# Altium PCB Zigbee_PCB.PcbDoc
Units mm, origin at the board's own origin, x right, y up, seen from the top; angles counter-clockwise.
Board outline 114.3 x 82.3 mm, 4 copper layers (Top Layer, Internal Plane 1, Internal Plane 2, Bottom Layer), stack 0.462 mm thick; 66 components, 51 nets, 247 pads, 36 vias.
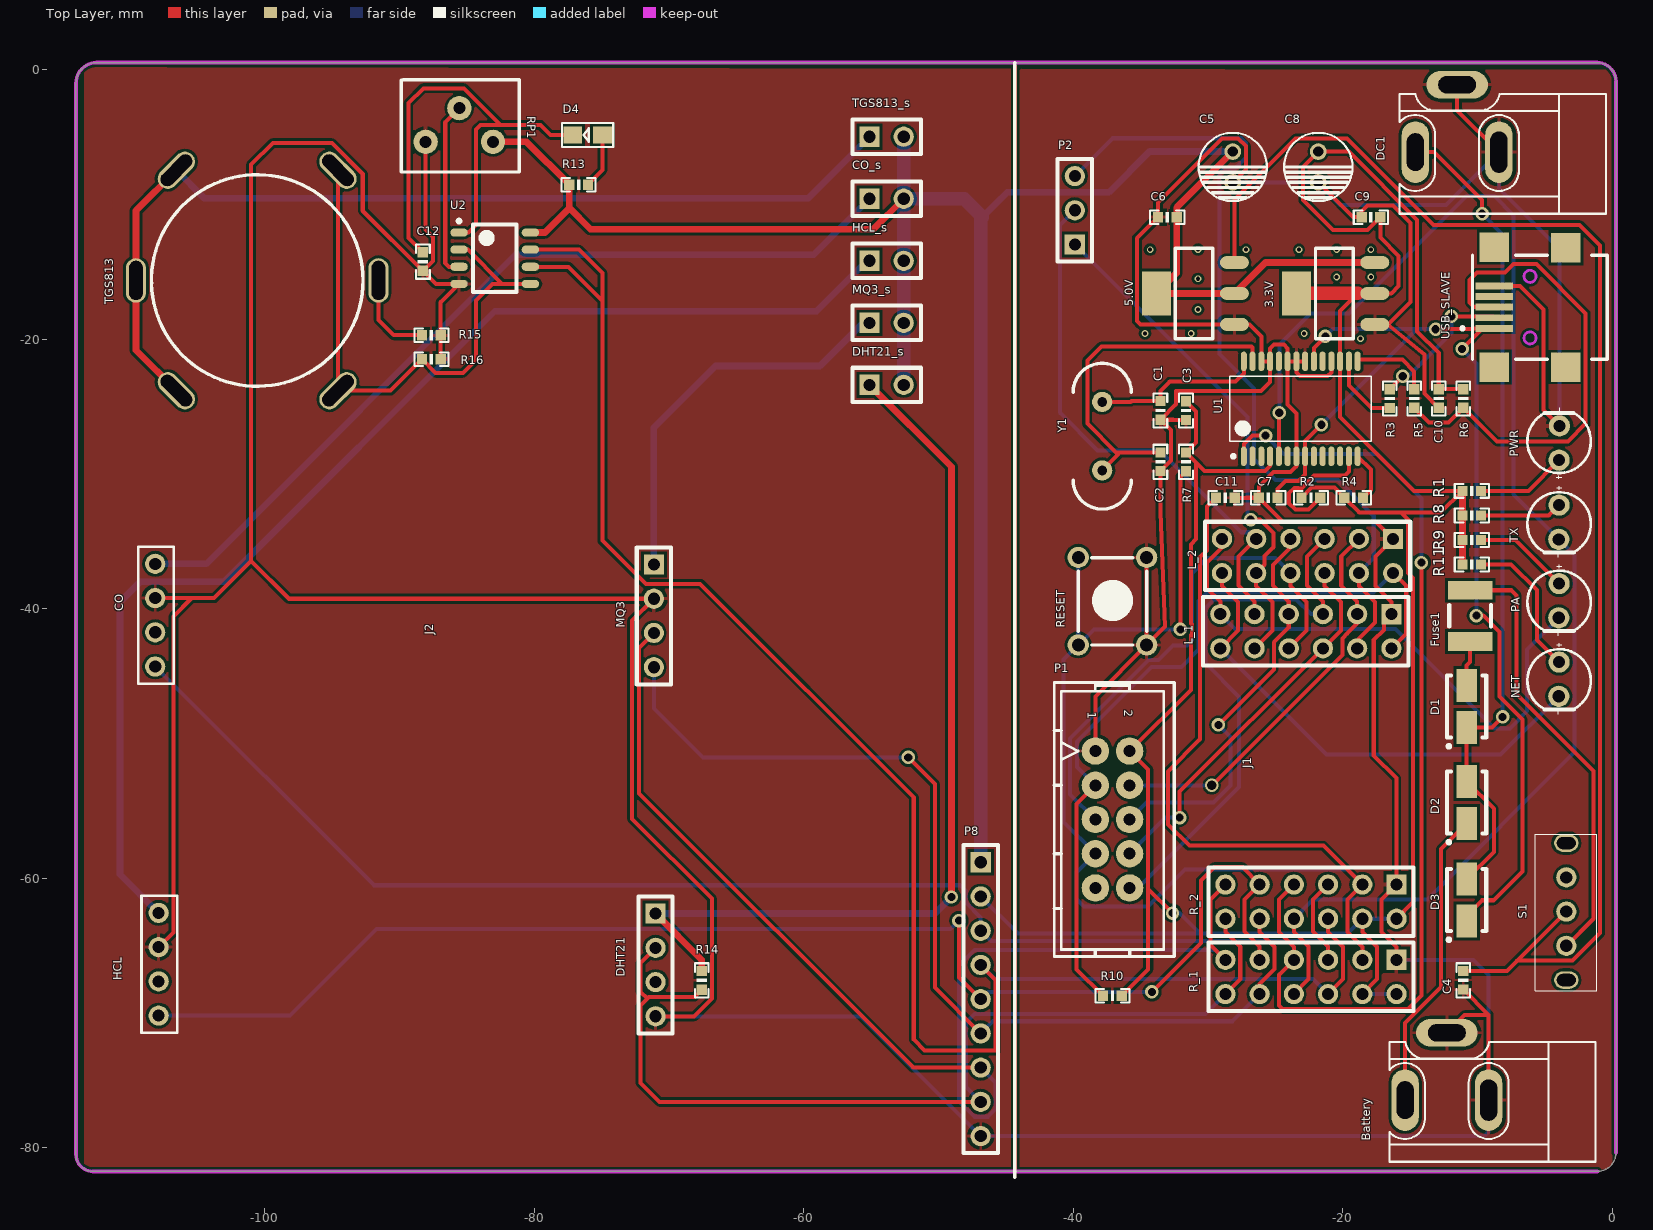
[diagram p0: Top Layer view]
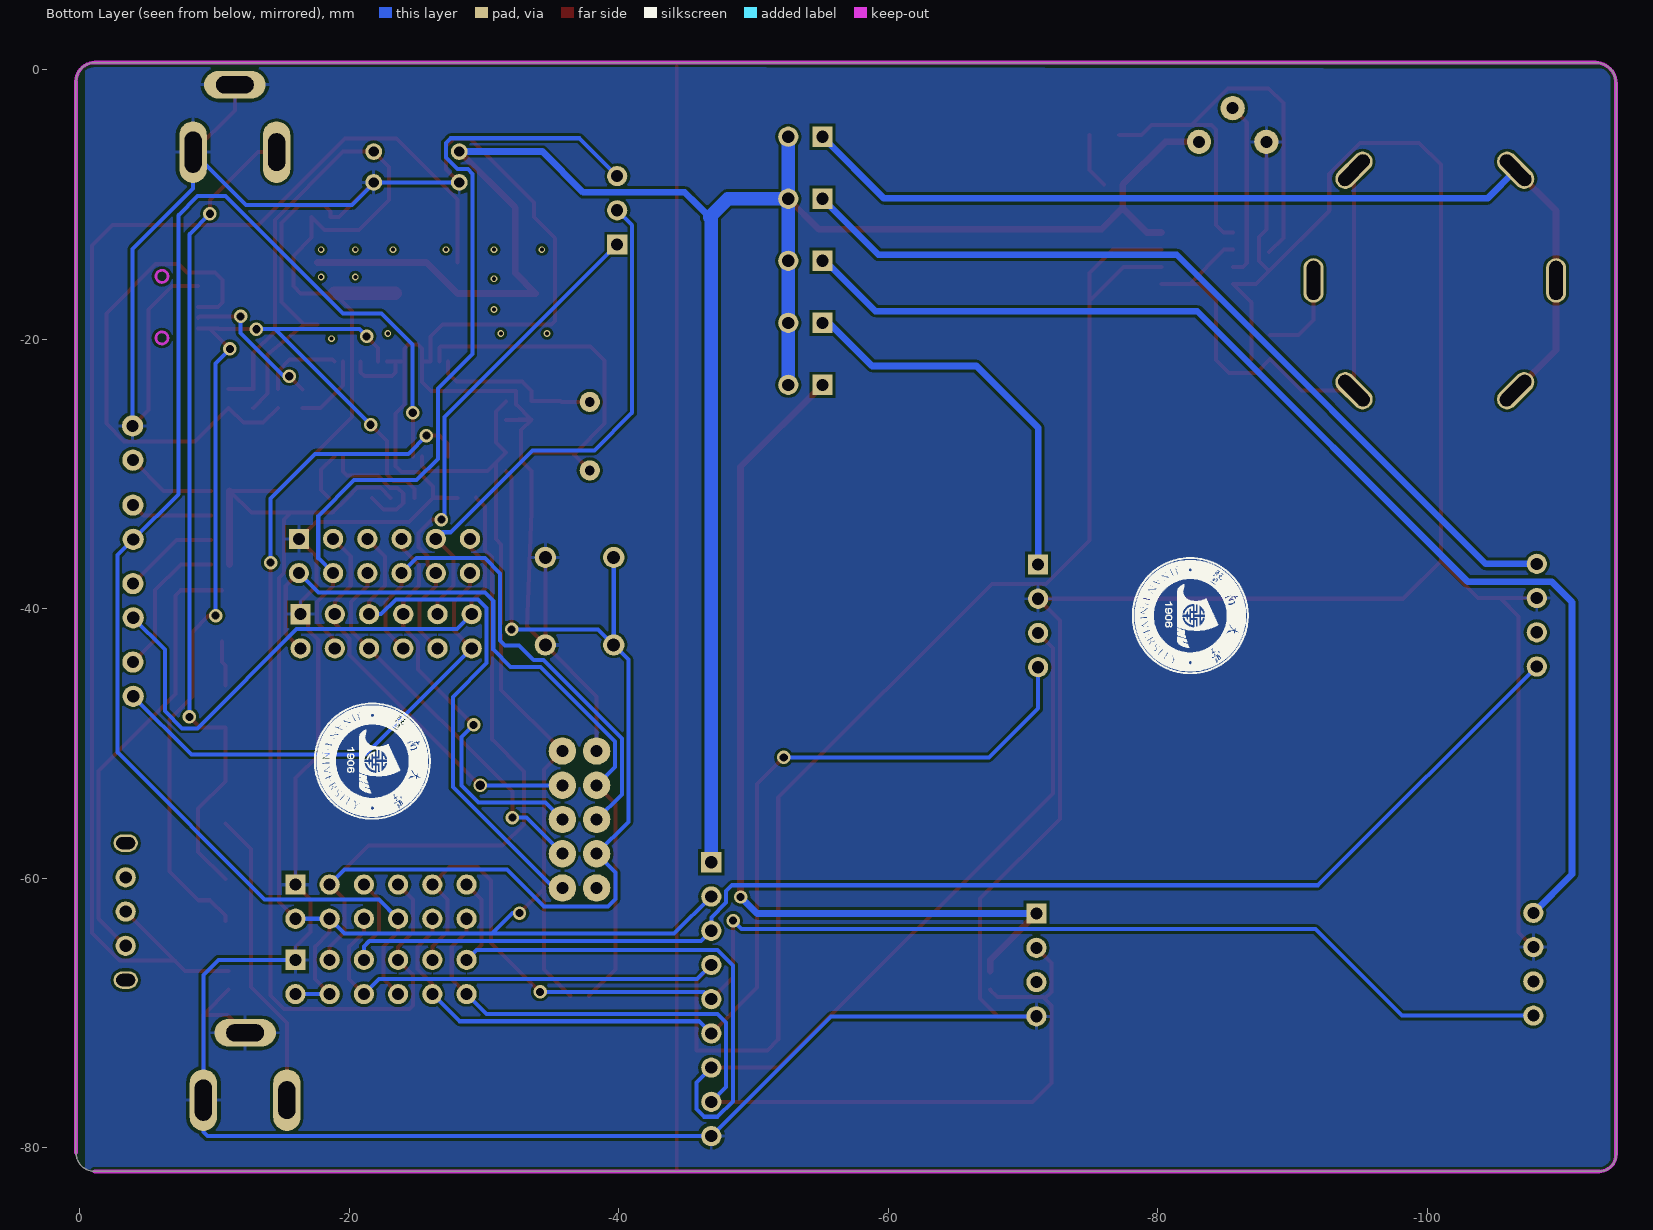
[diagram p1: Bottom Layer view, seen from below]
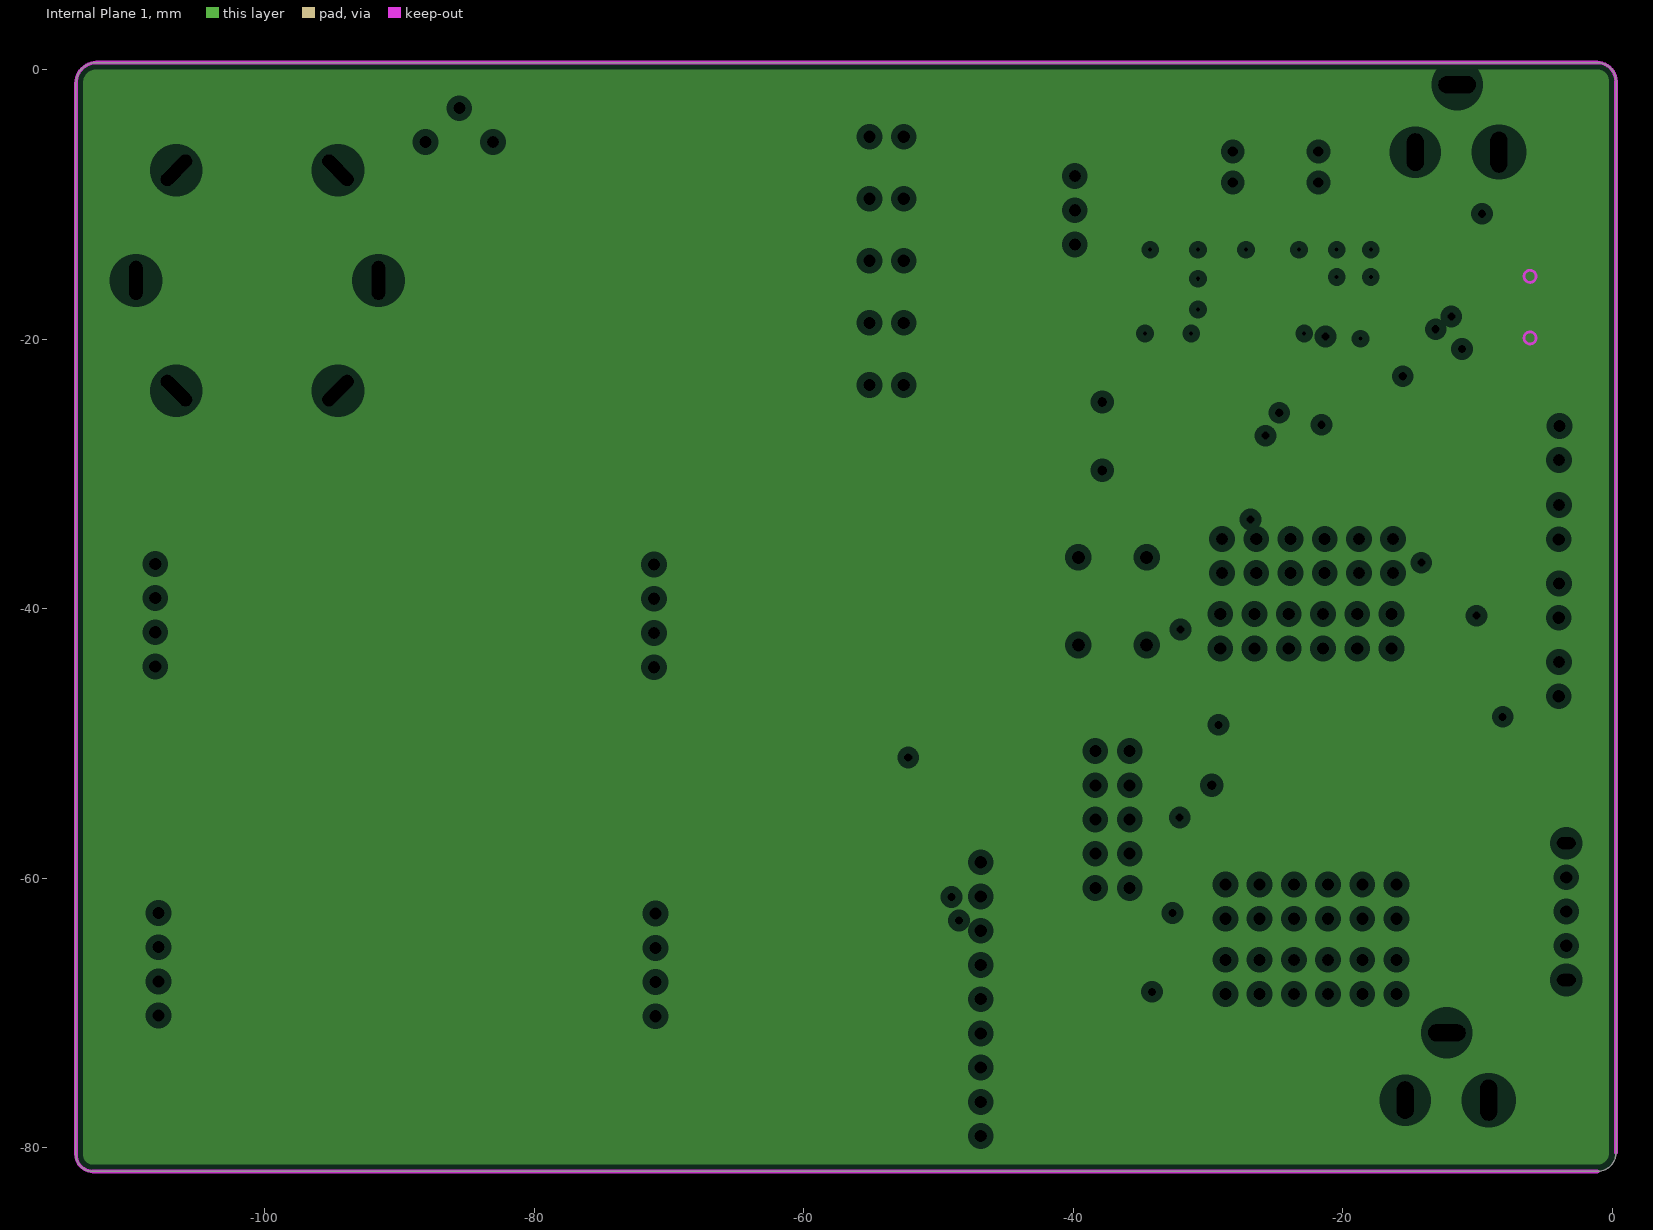
[diagram p2: Internal Plane 1, clearances drawn from the general rule]
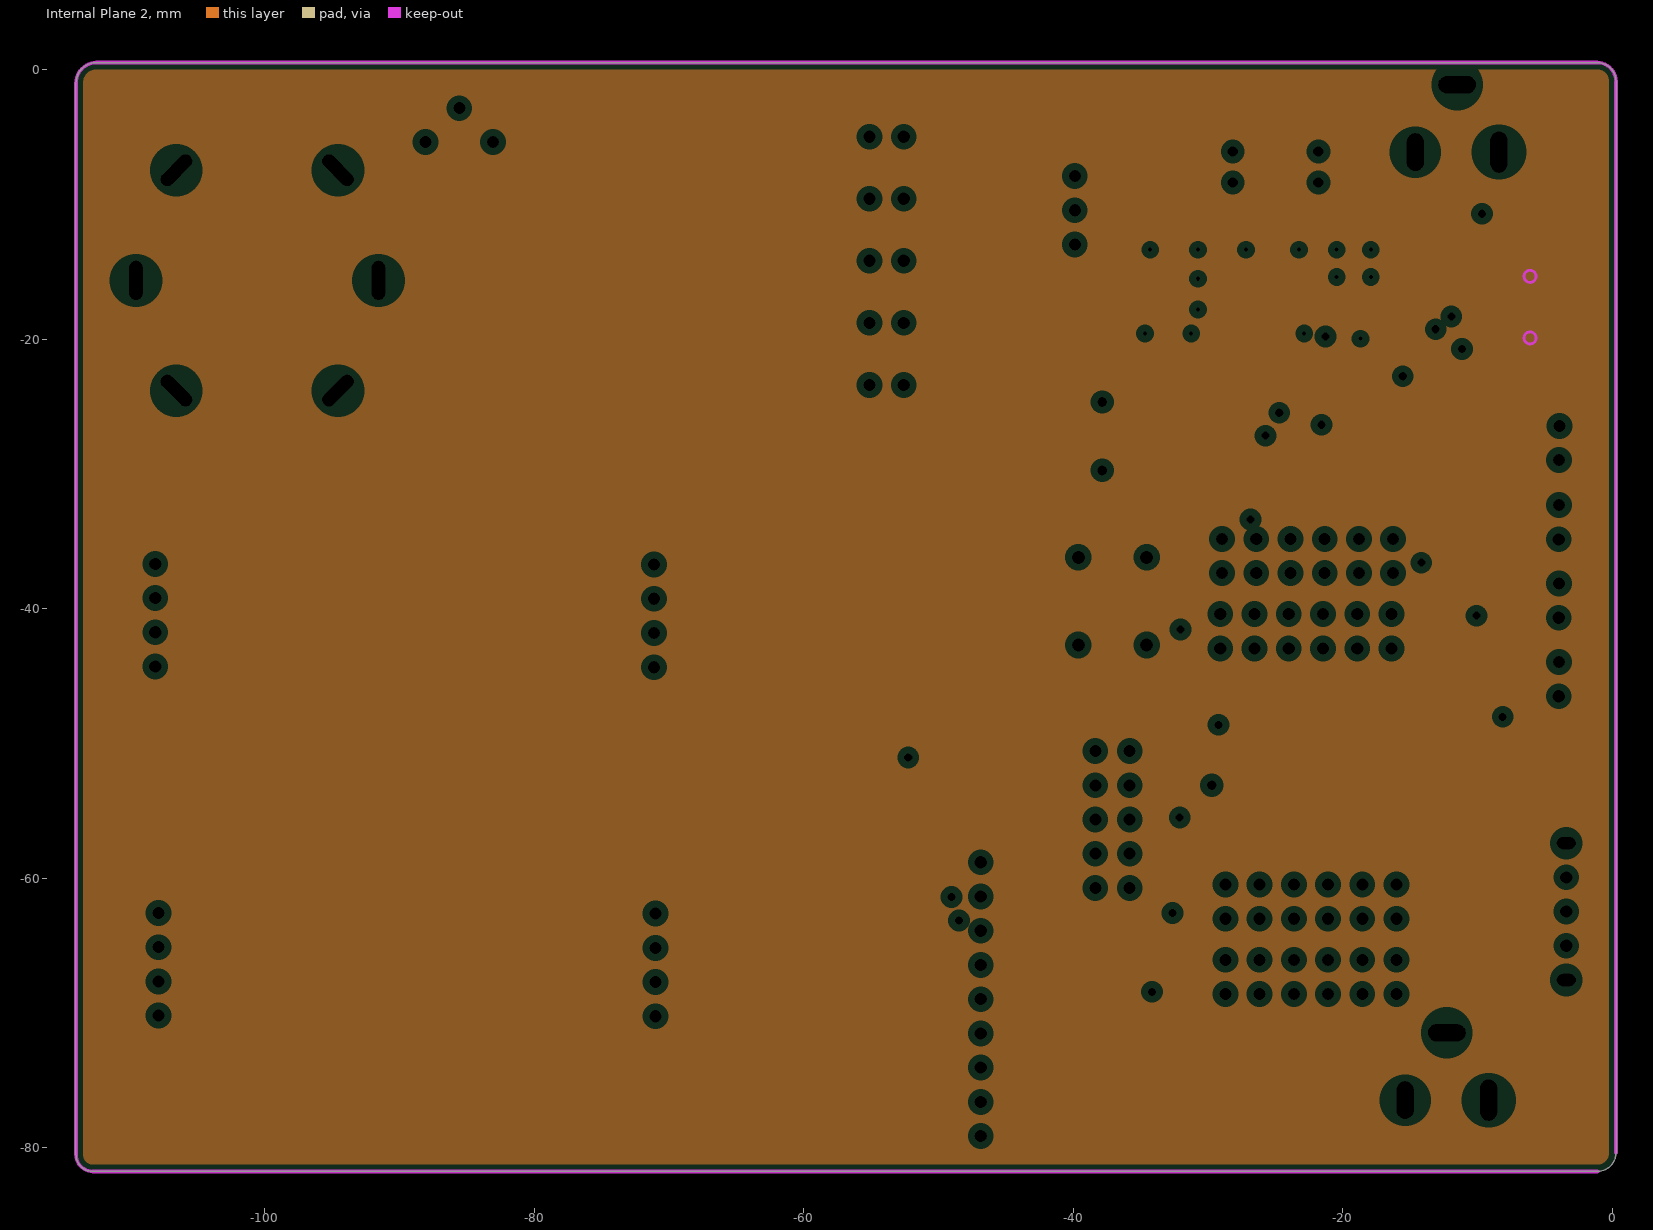
[diagram p3: Internal Plane 2, clearances drawn from the general rule]

## Layer stack, top to bottom
Top Solder: solder mask 0.0102, Solder Resist, Dk 3.5
Top Layer: signal copper 0.0356
Internal Plane 1: plane copper 0.0356
Internal Plane 2: plane copper 0.0356
Dielectric 1: dielectric 0.32, FR-4, Dk 4.8
Bottom Layer: signal copper 0.0356
Bottom Solder: solder mask 0.0102, Solder Resist, Dk 3.5

## Board outline
-112.741,-81.749 cw(c-112.741,-80.479) -114.011,-80.479 -114.011,-0.977 cw(c-112.487,-0.977) -112.487,0.547 -1.108,0.547 cw(c-1.108,-0.85) 0.289,-0.85 0.289,-80.352 cw(c-1.108,-80.352) -1.108,-81.749

## Design rules (kind name [scope] priority, off if disabled: settings)
Clearance [All] p1: gap=0.2
PlaneClearance [All] p1: clearance=0.508
PlaneConnect [All] p1: planeconnectstyle=Relief reliefexpansion=0.508 reliefentries=4 reliefconductorwidth=0.254 reliefairgap=0.254
PolygonConnect [All] p1: connectstyle=Relief reliefconductorwidth=0.254 reliefentries=4 polygonreliefangle="90 Angle" airgapwidth=0.254
RoutingVias [All] p1: holewidth=0.6 width=1 viastyle="Through Hole" minholewidth=0.711 minwidth=1.27 maxholewidth=0.711 maxwidth=1.27
SolderMaskExpansion [All] p1: expansion=0.102
Width [All] p1: maxlimit=1 minlimit=0.3 preferedwidth=0.3
28 further rules are at their usual default settings.

## Classes and differential pairs
component class U_Zigbee_broad: 3.3V 5.0V Battery C1 C2 C3 C4 C5 C6 C7 C8 C9 C10 C11 D1 D2 D3 DC1 Fuse1 J1 J2 L_1 L_2 NET P1 P2 PA PWR R1 R2 R3 R4 R5 R6 R7 R8 R9 R10 R11 R_1 R_2 RESET S1 TX U1 USB_SLAVE Y1
component class U_Sensor_Borad: C12 CO CO_s D4 DHT21 DHT21_s HCL HCL_s MQ3 MQ3_s P8 R13 R14 R15 R16 RP1 TGS813 TGS813_s U2

## Components (designator, comment, footprint, x,y, rotation, side; value= is the part's Value field where it differs from the comment)
3.3V "AMS1117-3.3" AMS1117 -17.618,-18.884 r90 top
5.0V "AMS1117-5.0" AMS1117 -28.032,-18.884 r90 top
Battery "BATT" DC -15.367,-76.454 r180 top
C1 "20P" 0603 -33.528,-25.273 r90 top
C2 "20P" 0603 -33.528,-29.083 r90 top
C3 "104" 0603 -31.623,-25.273 r270 top
C4 "104" 0603 -11.049,-67.564 r90 top
C5 "22uF" CAP2 -28.159,-6.057 r0 top
C6 "104" 0603 -33.02,-10.922 r0 top
C7 "104" 0603 -25.527,-31.75 r180 top
C8 "22uF" CAP2 -21.809,-6.057 r0 top
C9 "104" 0603 -17.907,-10.922 r0 top
C10 "104" 0603 -12.87,-24.384 r90 top
C11 "104" 0603 -28.702,-31.75 r180 top
C12 "104" 0603 -88.265,-14.224 r90 top
CO "HCL" hcl -111.633,-60.351 r270 top (schematic designator P5)
CO_s "Channel0" HDR1X2 -55.118,-9.557 r0 top (schematic designator CO)
D1 "IN5819" "IN4007 M7" -10.795,-47.244 r90 top
D2 "IN4007" "IN4007 M7" -10.795,-54.356 r90 top
D3 "IN4007" "IN4007 M7" -10.795,-61.595 r90 top
D4 "LED1" SMDLED -74.93,-4.826 r180 top
DC1 "DC" DC -14.605,-6.096 r180 top
DHT21 "DHT21" DHT11 -70.993,-62.611 r270 top (schematic designator P4)
DHT21_s "Channel0" HDR1X2 -55.118,-23.368 r0 top (schematic designator DHT21)
Fuse1 "1100mA" 1812 -10.541,-40.513 r90 top
HCL "HCL" hcl -111.379,-86.259 r270 top (schematic designator P7)
HCL_s "Channel0" HDR1X2 -55.118,-14.16 r0 top (schematic designator HCL)
J1 "JNU LOGO" "JNU LOGO - 1" -22.225,-51.181 r90 top
J2 "JNU LOGO-2" "JNU LOGO - 1" -82.931,-40.386 r90 top
L_1 "Left" HDR2X6 -16.383,-40.386 r180 top
L_2 "Left" HDR2X6 -16.256,-34.798 r180 top
MQ3 "MQ3" HDR1X4 -71.12,-36.703 r270 top (schematic designator P6)
MQ3_s "Channel0" HDR1X2 -55.118,-18.764 r0 top
NET "LED-直插" LED -3.937,-46.482 r90 top
P1 "Debug" "HEADER 2*5" -38.354,-58.166 r270 top
P2 "IO" HDR1X3 -39.878,-12.954 r90 top
P8 "Header 9" HDR1X9 -46.863,-58.801 r270 top
PA "LED-直插" LED -3.937,-40.657 r90 top
PWR "LED-直插" LED -3.937,-26.416 r270 top
R1 "391" 0603 -10.414,-31.242 r180 top
R2 "103" 0603 -22.352,-31.753 r180 top
R3 "27" 0603 -16.51,-24.384 r270 top
R4 "103" 0603 -19.177,-31.75 r180 top
R5 "27" 0603 -14.692,-24.384 r90 top
R6 "152" 0603 -11.049,-24.384 r90 top
R7 "103" 0603 -31.623,-29.083 r270 top
R8 "391" 0603 -10.414,-33.062 r180 top
R9 "391" 0603 -10.414,-34.883 r180 top
R10 "103" 0603 -37.084,-68.707 r180 top
R11 "391" 0603 -10.414,-36.703 r180 top
R13 "472" 0603 -76.708,-8.509 r0 top
R14 "103" 0603 -67.564,-67.564 r270 top
R15 "5R1" 0603 -87.63,-19.685 r180 top
R16 "102" 0603 -87.63,-21.463 r180 top
R_1 "Right" HDR2X6 -16.002,-66.04 r180 top
R_2 "Right" HDR2X6 -16.002,-60.452 r180 top
RESET "KEY_M" KEY_M -39.624,-42.672 r90 top
RP1 "RP" RP -83.058,-5.334 r180 top
S1 "SW" SWITCH -1.143,-68.326 r180 top
TGS813 "Gas_Sensor" TGS813-2 -80.391,-15.113 r0 top (schematic designator Sensor1)
TGS813_s "Channel0" HDR1X2 -55.118,-4.953 r0 top
TX "LED-直插" LED -3.937,-34.832 r90 top
U1 "PL2303" "PL2303 -SOP28N" -23.114,-25.146 r90 top
U2 "LM393" LM393 -82.931,-13.97 r0 top
USB_SLAVE "USB-B(Mini)" "MINI_USB - 1" -8.763,-19.177 r0 top
Y1 "12M" XTAL -37.846,-29.718 r90 top

## Footprints (in the part's own frame and the unit in brackets; to place one, negate y for a bottom-side part, rotate by r counter-clockwise, add the part's x,y. Pads: shape width x height; smd on the part's side, far side on the other; paste and mask are expansions set on the pad)
0603 [mil] "通用电容电阻0603 封装"
  rect 30x30 smd: 1(-27,0) 2(27.5,-0.06)
  silkscreen extent -50,-20 50,20
1812 [mm] "Chip Capacitor, Body 4.5x3.2mm, IPC High Density"
  rect 1.4x3.3 smd: 1(-1.9,0) 2(1.9,0)
  silkscreen extent -0.8,-1.55 0.8,1.55, body extent -2.4,-1.7 2.4,1.7, height 1.4
AMS1117 [mm] "SOT-223"
  oval 0.95x2.15 smd: 1(0,0) 2(2.3,0) 3(4.6,0)
  rect 3.25x2.15 smd: 4(2.3,5.8)
  silkscreen extent -1.05,1.6 5.65,4.4, body extent -0.92,-0.55 5.58,6.45, height 1.59
CAP2 [mm] "直插的电解电容，注意正负极，注意引脚距离"
  round 1.24 hole 0.762: 1(0,0) 2(0,-2.286)
  silkscreen extent -2.54,-3.68 2.54,1.39
DC [mil] "大DC座"
  oval 80x180 hole 50 slot 110 at 90 deg: 1(0,0)
  oval 80x180 hole 50 slot 120 at 90 deg: 2(-244.09,0)
  oval 180x80 hole 50 slot 110 at 0 deg: 3(-122.05,-196.85)
  silkscreen extent -557,-170 46,180
DHT11 [mm] "温湿度传感器,VCC：3-5.5V"
  rect 1.5x1.5 hole 0.9: 1(0,0)
  round 1.5 hole 0.9: 2(2.54,0) 3(5.08,0) 4(7.62,0)
  silkscreen extent -1.27,-1.27 8.89,1.27
hcl [mm]
  round 1.5 hole 0.9: 1(-23.698,3.505) 2(-21.158,3.505) 3(-18.618,3.505) 4(-16.078,3.505)
  silkscreen extent -24.97,2.24 -14.81,4.88
HDR1X2 [mm] "2.54mm"
  rect 1.5x1.5 hole 0.9: 1(0,0)
  round 1.5 hole 0.9: 2(2.54,0)
  silkscreen extent -1.27,-1.27 3.81,1.27
HDR1X3 [mm] "Connector; Header; 3 Position"
  rect 1.5x1.5 hole 0.9: 1(0,0)
  round 1.5 hole 0.9: 2(2.54,0) 3(5.08,0)
  silkscreen extent -1.27,-1.27 6.35,1.27
HDR1X4 [mm] "2.54mm"
  rect 1.5x1.5 hole 0.9: 1(0,0)
  round 1.5 hole 0.9: 2(2.54,0) 3(5.08,0) 4(7.62,0)
  silkscreen extent -1.27,-1.27 8.89,1.27
HDR1X9 [mm] "Connector; Header; 9 Position"
  rect 1.5x1.5 hole 0.9: 1(0,0)
  round 1.5 hole 0.9: 2(2.54,0) 3(5.08,0) 4(7.62,0) 5(10.16,0) 6(12.7,0) 7(15.24,0) 8(17.78,0) 9(20.32,0)
  silkscreen extent -1.27,-1.27 21.59,1.27
HDR2X6 [mm] "Connector; Header; 6x2 Position"
  rect 1.5x1.5 hole 0.9: 1(0,0)
  round 1.5 hole 0.9: 2(0,2.54) 3(2.54,0) 4(2.54,2.54) 5(5.08,0) 6(5.08,2.54) 7(7.62,0) 8(7.62,2.54) 9(10.16,0) 10(10.16,2.54) 11(12.7,0) 12(12.7,2.54)
  silkscreen extent -1.27,-1.27 13.97,3.81
"HEADER 2*5" [mil]
  round 80 hole 35: 1(-300,0) 2(-300,100) 3(-200,0) 4(-200,100) 5(-100,0) 6(-100,100) 7(0,0) 8(0,100) 9(100,0) 10(100,100)
  silkscreen extent -500,-120 300,230
"IN4007 M7" [mm] "IN4007 M7 贴片整流二极管DC-214 SMA"
  rect 2.45x1.55 smd: 1(-1.55,0) 2(1.55,0)
  silkscreen extent -3.07,-1.45 2.3,1.45, body extent -2.3,-1.45 2.3,1.45, height 2.44
"JNU LOGO - 1" [mm] "放在PCB背面的logo"
KEY_M [mil] "直插的4脚按键"
  round 62 hole 38: 1(0,0) 2(0,-200) 3(255.91,0) 4(255.91,-200)
  silkscreen extent 0,-200 255,0
LED [mil] "直插LED，长脚为正"
  round 62 hole 35.43: 1(100,0) 2(0,1)
  silkscreen extent -53,-93 155,93
LM393 [mm]
  oval 1.3x0.6 smd: 1(-2.65,1.905) 2(-2.65,0.635) 3(-2.65,-0.635) 4(-2.65,-1.905) 5(2.65,-1.905) 6(2.65,-0.635) 7(2.65,0.635) 8(2.65,1.905)
  silkscreen extent -2.77,-2.5 1.6,2.88, body extent -2,-2.5 2,2.5, height 1.55
"MINI_USB - 1" [mil] "MINI_USB,小USB接口"
  rect 110x20 smd: 1(0,0) 2(0,31) 3(0,62) 4(0,93) 5(0,124)
  rect 86x86 smd: 6(0,-113) 7(0,237) 8(210,-113) 9(210,236)
  Keep-Out Layer circle w7.87: c105,-28 r17.72
  Keep-Out Layer circle w7.87: c105,152 r17.72
  silkscreen extent -96,-90 331,214, body extent -35,-151 327,271, height 156
"PL2303 -SOP28N" [mm]
  oval 1.45x0.45 smd: 1(-3.525,4.225) 2(-3.525,3.575) 3(-3.525,2.925) 4(-3.525,2.275) 5(-3.525,1.625) 6(-3.525,0.975) 7(-3.525,0.325) 8(-3.525,-0.325) 9(-3.525,-0.975) 10(-3.525,-1.625) 11(-3.525,-2.275) 12(-3.525,-2.925) 13(-3.525,-3.575) 14(-3.525,-4.225) 15(3.525,-4.225) 16(3.525,-3.575) 17(3.525,-2.925) 18(3.525,-2.275) 19(3.525,-1.625) 20(3.525,-0.975) 21(3.525,-0.325) 22(3.525,0.325) 23(3.525,0.975) 24(3.525,1.625) 25(3.525,2.275) 26(3.525,2.925) 27(3.525,3.575) 28(3.525,4.225)
  silkscreen extent -3.65,-5.25 2.4,5.25, body extent -2.8,-5.25 2.8,5.25, height 2
RP [mm]
  round 1.8 hole 0.9: 1(0,0) 2(2.5,-2.5) 3(5,0)
  silkscreen extent -1.96,-4.6 6.81,2.24
SMDLED [mm] "贴片 0805LED"
  rect 1.4x1.27 smd: 1(0.001,-0.002) 2(2.211,-0.002)
  silkscreen extent -0.8,-0.89 3.01,0.89
SWITCH [mm] "弯角微拨开关 5脚，4.5mm*8.75mm"
  round 1.5 hole 0.9: 1(2.261,-3.327) 2(2.261,-5.867) 3(2.261,-8.407)
  oval 1.8x1.3 hole 0.9 slot 1.4 at 0 deg: ""(2.261,-0.787) ""(2.261,-10.947)
  silkscreen extent 0,-11.61 4.57,0
TGS813-2 [mm]
  oval 3.3x1.5 hole 1 slot 2.9 at 45 deg rot 45: 1(-26.168,7.672) 4(-14.168,-8.688)
  oval 1.5x3.3 hole 1 slot 2.9 at 90 deg: 2(-29.168,-0.508) 5(-11.168,-0.508)
  oval 3.3x1.5 hole 1 slot 2.9 at 135 deg rot 135: 3(-26.168,-8.688) 6(-14.168,7.672)
  silkscreen extent -28.04,-8.36 -12.32,7.34
XTAL [mm] "XTAL"
  round 1.5 hole 0.72: 1(0,0) 2(5.08,0)
  silkscreen extent -2.87,-2.16 7.95,2.16, body extent -2.79,-1.52 7.87,1.52, height 3.09

## Part data
3.3V 5.0V: library part AMS1117, "3.3V 5V:输入6.5V-12V"
Battery: library part BAT
C1 C2 C3 C4 C6 C7 C9 C10 C11: library part CAP, "CAP"
C5 C8: library part CAP-2
C12: library part C
CO_s DHT21_s HCL_s MQ3_s TGS813_s: library part Jumper2, "Jumper"
D1 D2 D3: library part "DIODE SCHOTTKY", "Schottky Diode"
D4: library part "LED SMD", "Typical RED, GREEN, YELLOW, AMBER GaAs LED"
DHT21: library part DHT11, "数字温湿度传感器,3-5.5V供电"
Fuse1: library part FUSH, "保险丝，保险丝的封装有很多，注意"
J1: "JNU logo"
J2: library part "JNU LOGO", "JNU logo"
L_1 L_2 R_1 R_2: library part "Header 6X2", "Header, 6-Pin, Dual row"
P1: library part "Header 5X2", "Header, 5-Pin, Dual row"
P2: library part "Header 3", "Header, 3-Pin"
P8: "Header, 9-Pin"
R1 R2 R3 R4 R5 R6 R7 R8 R9 R10 R11 R13 R14 R15 R16: library part Resistor
S1: library part SWITC, "微拨开关"
USB_SLAVE: library part USB_MINI
Y1: library part XTAL, "Crystal Oscillator"

## Via types
v1: diameter 1, hole 0.6, Top Layer to Bottom Layer, 21 vias
v2: diameter 0.5, hole 0.3, Top Layer to Bottom Layer, 14 vias
v3: diameter 1, hole 0.711, Top Layer to Bottom Layer, 1 vias

## Nets (pads, with @x,y where several pads share a name; then routed paths per layer and width w, separated by ;. In a path a pad name is that pad's centre, name@x,y a point inside that pad or via, vN(x,y) a via of type N, cw(c..) or ccw(c..) an arc to the next point about the centre after c; other vN are vias at no path point)
+3.3V: 3.3V.2 3.3V.4 C3.1 C8.1 C9.2 C10.2 P1.2 P8.2 R1.2 R2.2 R4.2 R6.2 R7.1 R8.2 R9.2 R10.1 R11.2 R_1.2 R_1.4 R_2.2 R_2.4 U1.4 U1.17 | length 222.2
  Top Layer w0.3: R10.1 -34.433,-66.742 -34.433,-60.769 ; v1(-32.63,-62.572) -34.433,-60.769 ; C3.1 -30.877,-25.333 -30.877,-27.651 R7.1 -30.877,-29.143 ; U1.4 -25.389,-29.381 -25.764,-29.756 -30.265,-29.756 -30.877,-29.143 ; R2.2 -22.299,-31 -20.624,-31 R4.2 -18.769,-32.854 -15.663,-32.854 ; R_1.4 -17.441,-67.479 -17.441,-65.071 -18.542,-63.969 R_2.4 ; R_2.2 -14.774,-61.764 -14.774,-37.706 -15.155,-37.325 -15.155,-33.362 -15.663,-32.854 ; R6.2 C10.2 -12.869,-20.992 -14.469,-19.392 -14.469,-11.122 -19.533,-6.057 C8.1 -22.952,-7.2 -22.952,-9.639 -20.717,-11.874 -18.159,-11.874 C9.2 -17.209,-12.433 -15.843,-13.798 -15.843,-16.034 -16.394,-16.584 3.3V.2 -18.888,-16.584 -20.189,-17.885 U1.17 -20.189,-25.742 -14.691,-31.24 R1.2 -12.727,-32.854 -15.663,-32.854 ; -34.433,-60.769 -34.433,-51.927 P1.2 -31.268,-46 -31.268,-41.94 -31.196,-41.868 -31.196,-41.164 -31.268,-41.092 -31.268,-35.211 -30.877,-34.82 -30.877,-29.143
  Top Layer w0.5: R11.2 R9.2 R8.2 R1.2
  Top Layer w1: 3.3V.4 -18.888,-16.584
  Bottom Layer w0.3: P8.2 -44.108,-64.096 -30.598,-64.096 ; v1(-32.63,-62.572) -32.122,-62.572 -30.598,-64.096 ; R_1.4 R_1.2 ; R_2.2 R_2.4 -19.646,-64.096 -30.598,-64.096
+5V: 3.3V.3 5.0V.2 5.0V.4 C5.1 C6.2 CO_s.2 DHT21_s.2 HCL_s.2 MQ3_s.2 P8.1 R13.1 RP1.1 TGS813_s.2 U2.8 | length 162.4
  Top Layer w0.5: RP1.1 -80.569,-5.334 R13.1 -77.394,-10.258 ; U2.8 -79.201,-12.065 -77.394,-10.258 ; CO_s.2 -54.832,-11.811 -75.841,-11.811 -77.394,-10.258 ; C5.1 -32.322,-10.22 C6.2 -32.322,-15.074 5.0V.4 5.0V.2 -25.732,-14.284 3.3V.3
  Bottom Layer w0.5: -46.863,-10.795 -46.736,-10.922 -45.81,-9.996 -44.894,-9.08 -37.354,-9.08 -34.332,-6.057 C5.1
  Bottom Layer w1: DHT21_s.2 MQ3_s.2 HCL_s.2 CO_s.2 ; TGS813_s.2 CO_s.2 ; P8.1 -46.863,-10.795 ; -46.736,-10.922 -48.101,-9.557 CO_s.2
DOUT: C12.2 D4.2 U2.1 | length 36.1
  Top Layer w0.3: C12.2 -89.323,-12.466 -89.323,-2.455 -88.226,-1.358 -85.219,-1.358 -82.501,-4.076 ; U2.1 -84.865,-12.065 -84.319,-11.518 -84.319,-4.406 -83.989,-4.076 -82.501,-4.076 ; D4.2 -78.795,-4.824 -79.544,-4.076 -82.501,-4.076
GND: 3.3V.1 5.0V.1 Battery.2 Battery.3 C1.1 C2.1 C3.2 C4.1 C5.2 C6.1 C7.2 C8.2 C9.1 C10.1 C11.1 C12.1 CO.2 DC1.2 DC1.3 DHT21.4 HCL.2 L_1.1 L_2.1 MQ3.2 P1.1 P8.9 PWR.2 R15.1 R16.1 R_1.1 R_2.1 RESET.2 RESET.4 RP1.3 U1.7 U1.18 U1.21 U1.22 U1.23 U1.25 U1.26 U2.4 USB_SLAVE.5 | length 508.6
  Top Layer w0.3: CO.2 -105.417,-39.193 ; HCL.2 -106.772,-64 -106.772,-40.549 -105.417,-39.193 ; RP1.3 -88.058,-11.849 -87.519,-12.388 -87.519,-14.164 C12.1 ; R16.1 R15.1 -86.944,-17.238 U2.4 -87.3,-15.875 C12.1 ; DHT21.4 -68.127,-70.231 -66.818,-68.922 -66.818,-61.506 -72.736,-55.587 -72.736,-40.859 MQ3.2 -98.213,-39.243 -101.007,-36.449 ; P1.1 -38.354,-46.482 RESET.2 ; RESET.4 RESET.2 ; C3.2 -32.592,-25.972 -32.604,-25.959 C1.1 ; C5.2 -27.189,-7.373 -27.189,-5.656 -27.758,-5.087 -28.963,-5.087 -33.706,-9.83 C6.1 -35.271,-12.488 -35.271,-18.63 -35.017,-18.884 5.0V.1 -26.92,-18.884 -26.039,-19.766 U1.26 U1.25 ; C11.1 -27.143,-31.75 -27.142,-31.748 C7.2 ; U1.21 U1.22 ; C8.2 -19.231,-10.922 C9.1 -18.593,-10.502 -18.161,-10.071 -16.272,-10.071 -14.977,-11.366 -14.977,-17.208 3.3V.1@-16.653,-18.884 ; U1.18 -20.839,-22.44 -21.118,-22.72 -23.16,-22.72 -23.439,-22.44 U1.22 ; 3.3V.1 3.3V.1@-16.653,-18.884 ; R_1.1 -16.002,-65.087 -17.11,-63.979 -17.11,-61.56 R_2.1 -16.002,-52.556 -17.695,-50.863 -17.695,-42.319 -16.928,-41.553 -16.928,-40.931 L_1.1 -16.383,-39.475 -17.568,-38.29 -17.568,-36.11 L_2.1 -17.514,-33.54 -24.434,-33.54 C7.2 ; C10.1 -13.935,-24.005 -13.935,-21.12 3.3V.1@-16.653,-18.884 ; Battery.3 -10.945,-70.132 -9.167,-70.132 ; DC1.3 -11.505,-2.996 DC1.2 ; C4.1 -9.167,-70.132 ; Battery.2 -9.167,-70.132 ; USB_SLAVE.5 -6.833,-16.027 -5.08,-17.78 -5.08,-25.248 PWR.2 ; -105.417,-39.193 -103.751,-39.193 -101.007,-36.449 ; -101.007,-36.449 -101.007,-7.027 -99.402,-5.422 -95.021,-5.422 -92.726,-7.718 -92.726,-10.449 C12.1 ; RESET.2 -33.189,-41.317 -33.528,-32.804 C2.1 -32.757,-28.998 -32.757,-26.73 C1.1 ; C1.1 -32.376,-24.807 -32.376,-23.812 -26.051,-23.812 -25.389,-23.15 U1.25 ; C7.2 -26.226,-30.925 -25.146,-29.845 -23.876,-29.845 -23.439,-29.408 U1.7 -23.439,-25.488 -24.089,-24.838 U1.23 ; U1.25 -25.389,-20.662 -25.108,-20.381 -24.37,-20.381 -24.089,-20.662 U1.23 ; U1.23 U1.22
  Bottom Layer w0.3: DHT21.4 -55.753,-70.231 P8.9 -9.46,-79.121 -9.167,-78.828 Battery.2 -9.167,-67.16 -10.287,-66.04 R_1.1 ; C5.2 C8.2 -21.809,-8.417 -20.193,-10.033 -12.342,-10.033 DC1.2 -8.405,-8.784 -3.912,-13.277 PWR.2
Net5.0V_3: 5.0V.3 C4.2 S1.2 | length 104.5
  Top Layer w0.3: 5.0V.3 -28.032,-9.617 -23.502,-5.087 -19.678,-5.087 -13.247,-11.518 -2.413,-11.518 -0.889,-13.042 -0.889,-64.04 -2.948,-66.099 -7.044,-66.099 ; C4.2 -7.811,-66.866 -7.044,-66.099 ; S1.2 -7.044,-66.099
NetBattery_1: Battery.1 D2.1 | length 22.4
  Top Layer w0.3: Battery.1 -15.367,-70.739 -12.7,-68.072 -12.7,-57.811 D2.1
NetC1_2: C1.2 U1.28 Y1.2 | length 12.7
  Top Layer w0.3: Y1.2 -35.729,-24.638 -35.665,-24.575 C1.2 -33.526,-23.808 -32.833,-23.114 -27.94,-23.114 -27.339,-22.513 U1.28
NetC2_2: C2.2 U1.27 Y1.1 | length 26.6
  Top Layer w0.3: Y1.1 -36.666,-28.538 -36.82,-28.385 ; C2.2 -36.82,-28.385 ; U1.27 -26.689,-20.61 -26.764,-20.535 -37.913,-20.535 -38.954,-21.577 -38.954,-26.25 -36.82,-28.385
NetCO_s_1: CO.1 CO_s.1 | length 64.2
  Bottom Layer w0.5: CO.1 -104.344,-36.653 -81.407,-13.716 -59.277,-13.716 CO_s.1
NetD1_1: D1.1 D2.2 D3.2 DC1.1 | length 61.3
  Top Layer w0.3: DC1.1 -13.208,-6.096 -9.652,-9.652 v1(-9.652,-10.668) ; D3.2 -8.773,-58.023 -8.773,-54.828 D2.2 D1.1 -8.916,-48.794 v1(-8.128,-48.006)
  Bottom Layer w0.3: v1(-9.652,-10.668) -8.128,-12.192 v1(-8.128,-48.006)
NetD1_2: D1.2 Fuse1.1 | length 3.4
  Top Layer w0.3: D1.2 -10.795,-44.183 -10.541,-43.929 Fuse1.1
NetD4_1: D4.1 R13.2 | length 4.1
  Top Layer w0.3: R13.2 -74.931,-7.432 D4.1
NetDHT21_s_1: DHT21.1 DHT21_s.1 R14.1 | length 68.7
  Top Layer w0.5: DHT21.1 -67.564,-66.04 R14.1 ; DHT21_s.1 -49.038,-29.448 v1(-49.038,-61.379)
  Bottom Layer w0.5: DHT21.1 -50.27,-62.611 v1(-49.038,-61.379)
NetFuse1_2: Fuse1.2 S1.1 | length 32.8
  Top Layer w0.3: Fuse1.2 -7.488,-38.613 -7.112,-38.989 -7.112,-46.322 -1.397,-52.037 -1.397,-62.992 S1.1
NetHCL_s_1: HCL.1 HCL_s.1 | length 90.4
  Bottom Layer w0.5: HCL.1 -110.744,-59.691 -110.744,-39.497 -109.22,-37.973 -102.997,-37.973 -82.931,-17.907 -59.055,-17.907 -55.309,-14.161 HCL_s.1
NetMQ3_s_1: MQ3.1 MQ3_s.1 | length 29.4
  Bottom Layer w0.5: MQ3.1 -71.12,-26.543 -66.548,-21.971 -58.801,-21.971 -55.594,-18.764 MQ3_s.1
NetNET_1: NET.1 R11.1 | length 10.9
  Top Layer w0.3: R11.1 -7.493,-36.703 -5.588,-38.608 -5.588,-42.291 NET.1
NetPA_1: PA.1 R9.1 | length 7.1
  Top Layer w0.3: R9.1 -7.171,-34.883 PA.1
NetPWR_1: PWR.1 R1.1 | length 6.7
  Top Layer w0.3: R1.1 -6.223,-31.242 PWR.1
NetR2_1: R2.1 U1.13 | length 9.9
  Top Layer w0.3: R2.1 -22.539,-32.626 -23.511,-32.626 -24.003,-32.134 -24.003,-31.447 -23.577,-31.021 -23.027,-31.021 -22.117,-30.111 -19.844,-30.111 -19.539,-29.806 U1.13
NetR3_1: R3.1 USB_SLAVE.2 | length 10.7
  Top Layer w0.3: R3.1 v1(-15.545,-22.733) ; v1(-11.938,-18.288) -8.865,-18.288 USB_SLAVE.2
  Bottom Layer w0.3: v1(-15.545,-22.733) -15.156,-22.733 -11.938,-19.515 v1(-11.938,-18.288)
NetR3_2: R3.2 U1.16 | length 5.5
  Top Layer w0.3: U1.16 -19.539,-23.416 -17.872,-25.083 R3.2
NetR4_1: R4.1 U1.14 | length 3.7
  Top Layer w0.3: U1.14 -17.907,-29.653 -17.907,-31.166 R4.1
NetR5_1: R5.1 R6.1 USB_SLAVE.3 | length 37.7
  Top Layer w0.3: R5.1 -13.587,-26.174 -12.153,-26.174 R6.1 -8.548,-27.571 -3.293,-27.571 -1.972,-26.25 -1.972,-18.072 -5.63,-14.414 -7.331,-14.414 -7.941,-15.024 -10.024,-15.024 -10.583,-15.582 -10.583,-17.272 -10.252,-17.602 USB_SLAVE.3
NetR5_2: R5.2 U1.15 | length 5.9
  Top Layer w0.3: U1.15 -18.762,-21.494 -15.563,-21.494 -14.69,-22.367 R5.2
NetR8_1: R8.1 TX.1 | length 6.1
  Top Layer w0.3: R8.1 -4.707,-33.062 TX.1
NetR15_2: R15.2 TGS813.5 | length 6.6
  Top Layer w0.3: TGS813.5 -91.559,-18.55 -90.426,-19.683 R15.2
NetR16_2: R16.2 TGS813.4 TGS813.6 U2.2 U2.5 | length 41.6
  Top Layer w0.3: TGS813.6 TGS813.4 -90.668,-23.801 R16.2 -87.311,-22.479 -85.297,-22.479 -84.328,-21.51 -84.328,-17.106 -83.097,-15.875 -82.388,-15.875 ; U2.2 -84.928,-13.335 -82.388,-15.875 ; U2.5 -82.388,-15.875
NetRP1_2: RP1.2 U2.3 | length 13.1
  Top Layer w0.3: U2.3 -86.312,-14.605 -86.605,-14.312 -86.605,-3.881 RP1.2
NetTGS813_1: TGS813.1 TGS813.2 TGS813.3 TGS813_s.1 | length 73
  Top Layer w0.5: TGS813.3 -109.559,-20.801 TGS813.2 -109.559,-10.441 TGS813.1
  Bottom Layer w0.5: TGS813.1 -104.475,-9.525 -59.69,-9.525 TGS813_s.1
P0_0/CO: CO.4 P8.3 R_1.5 R_2.5 | length 104.2
  Top Layer w0.3: R_1.5 -21.082,-65.052 -22.19,-63.944 -22.19,-61.56 R_2.5
  Bottom Layer w0.3: CO.4 -91.896,-60.505 -48.397,-60.505 -47.963,-60.938 -47.963,-61.797 -46.863,-62.897 P8.3 -46.089,-64.655 -21.479,-64.655 -21.082,-65.052 R_1.5
P0_1/TGS813: P8.4 R_1.6 R_2.6 U2.6 U2.7 | length 127.7
  Top Layer w0.3: U2.6 -77.47,-14.605 -74.946,-17.129 ; U2.7 -76.686,-13.335 -74.946,-15.074 -74.946,-34.912 -71.72,-38.138 -67.682,-38.138 -51.832,-53.987 -51.832,-71.97 -51.019,-72.783 -45.762,-72.783 -45.762,-67.523 P8.4 ; R_1.6 -19.981,-67.479 -19.981,-65.071 -21.082,-63.969 R_2.6
  Bottom Layer w0.3: P8.4 -45.809,-67.475 -22.187,-67.475 R_1.6
P0_2/RX: R_1.7 R_2.7 U1.1 | length 74.6
  Top Layer w0.3: U1.1 -27.339,-27.774 -26.704,-27.139 v1(-25.721,-27.139) ; R_2.7 -24.73,-61.56 -24.73,-63.979 -23.622,-65.087 R_1.7 -24.73,-67.148 -24.73,-69.43 -24.476,-69.684 -15.155,-69.684 -14.164,-68.694 v1(-14.164,-36.563)
  Bottom Layer w0.3: v1(-25.721,-27.139) -24.375,-28.486 -17.466,-28.486 -14.164,-31.788 v1(-14.164,-36.563)
P0_3/TX: R_1.8 R_2.8 TX.2 U1.5 | length 105
  Top Layer w0.3: U1.5 -24.739,-25.472 v1(-24.705,-25.438) ; R_1.8 -22.521,-67.479 -22.521,-65.062 -23.622,-63.96 R_2.8
  Bottom Layer w0.3: v1(-24.705,-25.438) -24.705,-20.383 -22.394,-18.072 -19.523,-18.072 -10.811,-9.359 -8.728,-9.359 -7.306,-10.782 -7.306,-31.488 TX.2 -2.785,-36.01 -2.785,-50.634 -13.711,-61.56 -22.19,-61.56 R_2.8
P0_4/HCL: HCL.4 P8.5 R_1.9 R_2.9 | length 103.3
  Top Layer w0.3: v1(-48.479,-63.131) -48.479,-67.345 P8.5 ; v1(-34.154,-68.414) -30.522,-64.782 -30.522,-60.159 -29.531,-59.169 -27.445,-59.169 R_2.9 -27.27,-61.56 -27.27,-63.944 -26.162,-65.052 R_1.9
  Bottom Layer w0.3: HCL.4 -98.121,-70.181 -91.694,-63.754 -49.102,-63.754 v1(-48.479,-63.131) ; P8.5 -46.316,-68.414 v1(-34.154,-68.414)
P0_5/MQ3_A0: MQ3.4 P8.6 R_1.10 R_2.10 | length 74.6
  Top Layer w0.3: v1(-52.239,-51.015) -50.257,-52.997 -50.257,-68.107 P8.6 ; R_1.10 -26.162,-67.84 -25.061,-66.738 -25.061,-65.071 -26.162,-63.969 R_2.10
  Bottom Layer w0.3: MQ3.4 -71.12,-47.371 -67.476,-51.015 v1(-52.239,-51.015) ; P8.6 -45.961,-70.599 -28.181,-70.599 R_1.10
P0_6/MQ3_B0: MQ3.3 P8.7 R_1.11 R_2.11 | length 90.3
  Top Layer w0.3: MQ3.3 -72.228,-42.891 -72.228,-53.682 -51.87,-74.041 P8.7 ; R_1.11 -29.81,-64.932 -29.81,-61.56 R_2.11
  Bottom Layer w0.3: P8.7 -45.762,-75.143 -45.762,-77.127 -46.32,-77.685 -47.336,-77.685 -48.479,-76.542 -48.479,-66.459 -47.336,-65.316 -29.426,-65.316 R_1.11
P0_7/DHT21: DHT21.2 P8.8 R14.2 R_1.12 R_2.12 | length 74
  Top Layer w0.3: DHT21.2 -72.101,-66.259 -72.101,-68.414 -71.593,-68.922 ; R14.2 -68.099,-68.795 -71.466,-68.795 -71.593,-68.922 ; P8.8 -70.704,-76.581 -72.101,-75.184 -72.101,-69.43 -71.593,-68.922 ; R_1.12 -27.601,-67.479 -27.601,-65.071 -28.702,-63.969 R_2.12
  Bottom Layer w0.3: P8.8 -47.971,-75.473 -47.971,-70.7 -47.336,-70.065 -30.187,-70.065 R_1.12
P1_0/NET: L_1.12 L_2.12 NET.2 | length 36.8
  Top Layer w0.3: L_1.12 -27.753,-41.596 -27.753,-39.484 -28.956,-38.281 L_2.12
  Bottom Layer w0.3: L_1.12 -21.197,-50.812 -8.293,-50.812 NET.2
P1_1/PA: L_1.11 L_2.11 PA.2 | length 41.2
  Top Layer w0.3: L_1.11 -29.083,-39.458 -30.072,-38.469 -30.072,-36.545 -28.956,-35.429 L_2.11
  Bottom Layer w0.3: L_1.11 -27.979,-41.49 -16.094,-41.49 -8.728,-48.856 -7.585,-48.856 -6.315,-47.586 -6.315,-43.01 PA.2
P1_2: L_1.10 L_2.10 P2.1 | length 38.1
  Top Layer w0.3: v1(-26.839,-33.362) -26.153,-33.362 -25.137,-34.378 -25.137,-35.42 -25.797,-36.08 -25.797,-36.719 L_2.10 -26.416,-38.281 -25.213,-39.484 -25.213,-41.596 L_1.10
  Bottom Layer w0.3: P2.1 -27.071,-25.761 -27.071,-33.13 v1(-26.839,-33.362)
P1_3: L_1.9 L_2.9 P2.2 | length 40.6
  Top Layer w0.3: L_1.9 -26.543,-39.458 -27.728,-38.274 -27.728,-36.11 L_2.9
  Bottom Layer w0.3: P2.2 -40.986,-11.522 -40.986,-25.438 -38.192,-28.232 -33.601,-28.232 -27.524,-34.308 -26.906,-34.308 L_2.9
P1_4/CSN: L_1.8 L_2.8 P1.5 | length 38.7
  Top Layer w0.3: L_1.8 -22.673,-41.596 -22.673,-39.484 -23.876,-38.281 L_2.8
  Bottom Layer w0.3: P1.5 -40.22,-53.76 -40.22,-49.618 -34.404,-43.802 -33.686,-43.802 -32.594,-42.71 -31.551,-42.71 -31.195,-42.354 -31.195,-37.364 -30.064,-36.233 -24.981,-36.233 L_2.8
P1_5/SCLK: L_1.7 L_2.7 P1.6 | length 30.4
  Top Layer w0.3: v1(-29.226,-48.602) -25.103,-44.479 -25.103,-42.47 -24.003,-41.37 L_1.7 -24.003,-39.458 -25.188,-38.274 -25.188,-36.741 -23.876,-35.429 L_2.7
  Bottom Layer w0.3: P1.6 -34.544,-54.356 -29.591,-54.356 -28.321,-53.086 -28.321,-49.508 v1(-29.226,-48.602)
P1_6/MOSI: L_1.6 L_2.6 P1.8 | length 28.4
  Top Layer w0.3: v1(-32.096,-55.486) -32.096,-53.559 L_1.6 -20.133,-41.596 -20.133,-39.484 -21.336,-38.281 L_2.6
  Bottom Layer w0.3: P1.8 -33.134,-55.486 v1(-32.096,-55.486)
P1_7/MISO: L_1.5 L_2.5 P1.10 | length 41.6
  Top Layer w0.3: L_1.5 -21.463,-39.458 -22.648,-38.274 -22.648,-36.11 L_2.5
  Bottom Layer w0.3: P1.10 -35.179,-60.706 -27.686,-53.213 -27.686,-46.523 -30.183,-44.026 -30.183,-39.913 -29.556,-39.286 -23.46,-39.286 -22.36,-40.386 L_1.5
P2_0: L_1.4 L_2.4 P2.3 | length 61.7
  Top Layer w0.3: L_1.4 -18.923,-42.329 -17.593,-40.999 -17.593,-39.484 -18.796,-38.281 L_2.4
  Bottom Layer w0.3: P2.3 -37.071,-5.067 -27.524,-5.067 -27.169,-5.422 -27.169,-6.489 -28.032,-7.353 -28.794,-7.353 -29.15,-7.708 -29.15,-21.069 -26.571,-23.648 -26.571,-28.855 -24.984,-30.441 -20.362,-30.441 -17.695,-33.108 -17.695,-36.237 L_2.4
P2_1/DD: L_1.3 L_2.3 P1.4 | length 29.9
  Top Layer w0.3: v3@-29.707,-53.097 -20.023,-43.413 -20.023,-42.193 -19.633,-41.803 -19.633,-41.778 -18.923,-41.068 L_1.3 -18.923,-39.458 -20.108,-38.274 -20.108,-36.11 L_2.3
  Bottom Layer w0.3: P1.4 v3(-29.718,-53.086)
P2_2/DC: L_1.2 L_2.2 P1.3 R10.2 | length 58
  Top Layer w0.3: P1.3 -39.742,-54.474 -39.742,-66.746 R10.2 ; L_1.2 -15.282,-41.825 -15.282,-38.313 L_2.2
  Bottom Layer w0.3: P1.3 -39.72,-51.72 -39.72,-49.825 -34.204,-44.309 -31.978,-44.309 -30.683,-43.014 -30.683,-39.405 -30.064,-38.786 -17.704,-38.786 L_2.2
RESET: C11.2 P1.7 R7.2 R_1.3 R_2.3 RESET.1 RESET.3 | length 118.8
  Top Layer w0.3: v1(-32.046,-41.516) -32.046,-30.202 R7.2 ; C11.2 -30.064,-32.412 -30.064,-35.648 -30.572,-36.156 -30.572,-49.669 -32.96,-52.057 -32.96,-55.994 -31.385,-57.569 -21.425,-57.569 R_2.3 -19.65,-61.56 -19.65,-63.979 -18.542,-65.087 R_1.3
  Bottom Layer w0.3: RESET.3 RESET.1 ; v1(-32.046,-41.516) -38.468,-41.516 RESET.1 ; R_2.3 -19.647,-59.347 -31.716,-59.347 -34.441,-62.072 -39.208,-62.072 -39.742,-61.539 -39.742,-59.554 P1.7 -40.72,-55.8 -40.72,-43.768 RESET.1
USB_5V: C7.1 D3.1 U1.8 U1.20 USB_SLAVE.1 | length 81.3
  Top Layer w0.3: C7.1 -24.841,-31.107 -24.255,-30.521 -23.294,-30.521 -22.789,-30.016 U1.8 -22.789,-27.535 v1(-21.581,-26.327) ; U1.20 -22.139,-20.637 v1(-21.276,-19.773) ; v1(-13.097,-19.24) -10.315,-19.24 -10.252,-19.177 USB_SLAVE.1@-9.617,-19.177 ; v1(-11.141,-20.701) USB_SLAVE.1@-9.617,-19.177 ; D3.1 -10.795,-62.738 -9.677,-61.62 -8.792,-61.62 -6.671,-59.499 -6.671,-48.194 -8.373,-46.492 -8.373,-41.694 -9.567,-40.5 v1(-10.075,-40.5) ; USB_SLAVE.1 USB_SLAVE.1@-9.617,-19.177
  Bottom Layer w0.3: v1(-21.581,-26.327) -14.494,-19.24 ; v1(-21.276,-19.773) -20.743,-19.24 -14.494,-19.24 ; v1(-13.097,-19.24) -14.494,-19.24 ; v1(-11.141,-20.701) -10.075,-21.768 v1(-10.075,-40.5)
pads on no net: CO.3 DHT21.3 HCL.3 P1.9 S1. S1.3 U1.2 U1.3 U1.6 U1.9 U1.10 U1.11 U1.12 U1.19 U1.24 USB_SLAVE.4 USB_SLAVE.6 USB_SLAVE.7 USB_SLAVE.8 USB_SLAVE.9
copper on no net: | length 82
  Top Layer w0.254: -44.288,-81.749 -44.288,0.293
  other v2: -18.669,-19.939 -34.671,-19.558 -31.242,-19.558 -22.86,-19.558 -30.734,-17.78 -30.734,-15.494 -20.447,-15.367 -17.907,-15.367 -34.29,-13.335 -30.734,-13.335 -27.178,-13.335 -23.241,-13.335 -20.447,-13.335 -17.907,-13.335

## Polygon pours and split planes (outlines as drawn)
GND on Bottom Layer "Top Layer-No Net" (solid, pour order 2): -113.57,0.105 -113.57,-81.308 -113.647,-81.385 -113.46,-81.573 -0.404,-81.573 -0.404,0.112 -0.258,0.258
GND on Top Layer "Top Layer-No Net" (solid, pour order 4): -113.454,0.201 -113.382,0.128 -113.382,-81.589 -0.386,-81.589 -0.258,-81.461 0,-81.203 0,0

## Keep-outs
Keep-Out Layer:
  lines w0.254: -114.011,-80.479 ccw(c-112.741,-80.479) -112.741,-81.749 ; -114.011,-0.977 cw(c-112.487,-0.977) -112.487,0.547 ; -1.108,0.547 cw(c-1.108,-0.85) 0.289,-0.85
  lines w0.3: -114.011,-80.479 -114.011,-0.977 ; -112.741,-81.749 -1.108,-81.749 ; -112.487,0.547 -1.108,0.547 ; 0.289,-80.352 0.289,-0.85

## Silkscreen, mask and mechanical layers (free items; w line width, h text height)
Top Overlay:
  lines w0.254: -44.323,-82.169 -44.323,0.547
Drill Drawing:
  text ".LEGEND" at 106.451,-130.396 h0.64
  text "Drill Drawing." at 106.451,-132.936 h0.64

## Text inside footprints (layer, text, board x,y; h text height)
P1: Top Overlay "2" at -36.195,-47.498 h0.64 r270; Top Overlay "1" at -38.938,-47.625 h0.64 r270